# EAGLE board Launch-28020_V1 (EAGLE 8.4.0)
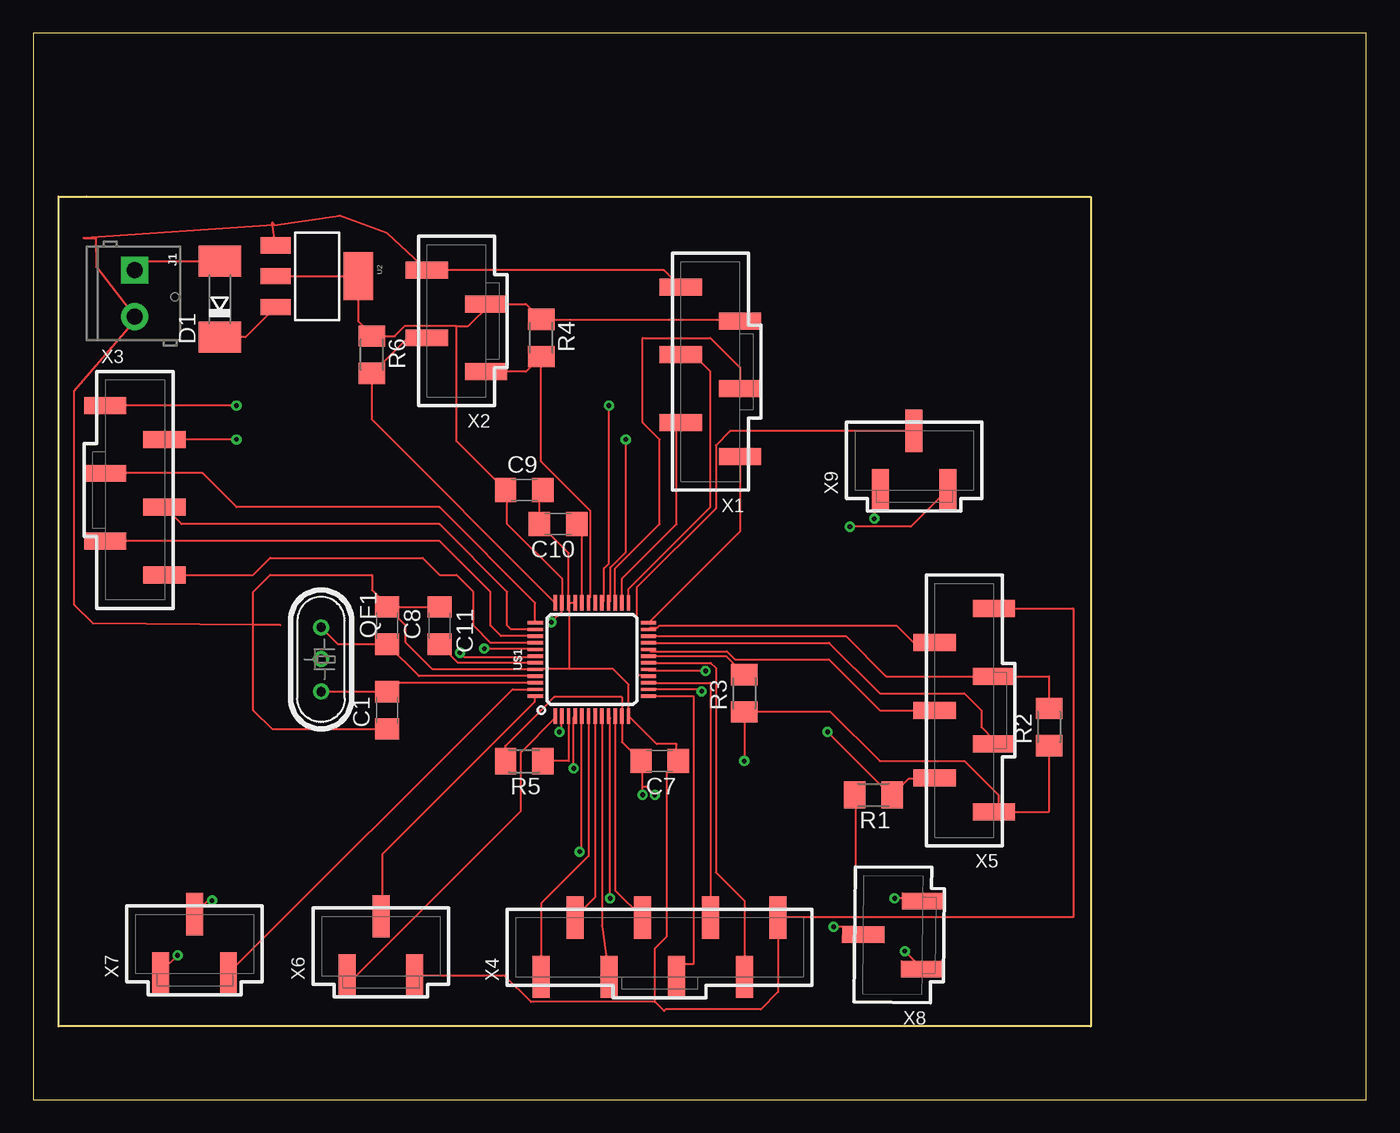
[diagram p0: board, top side]
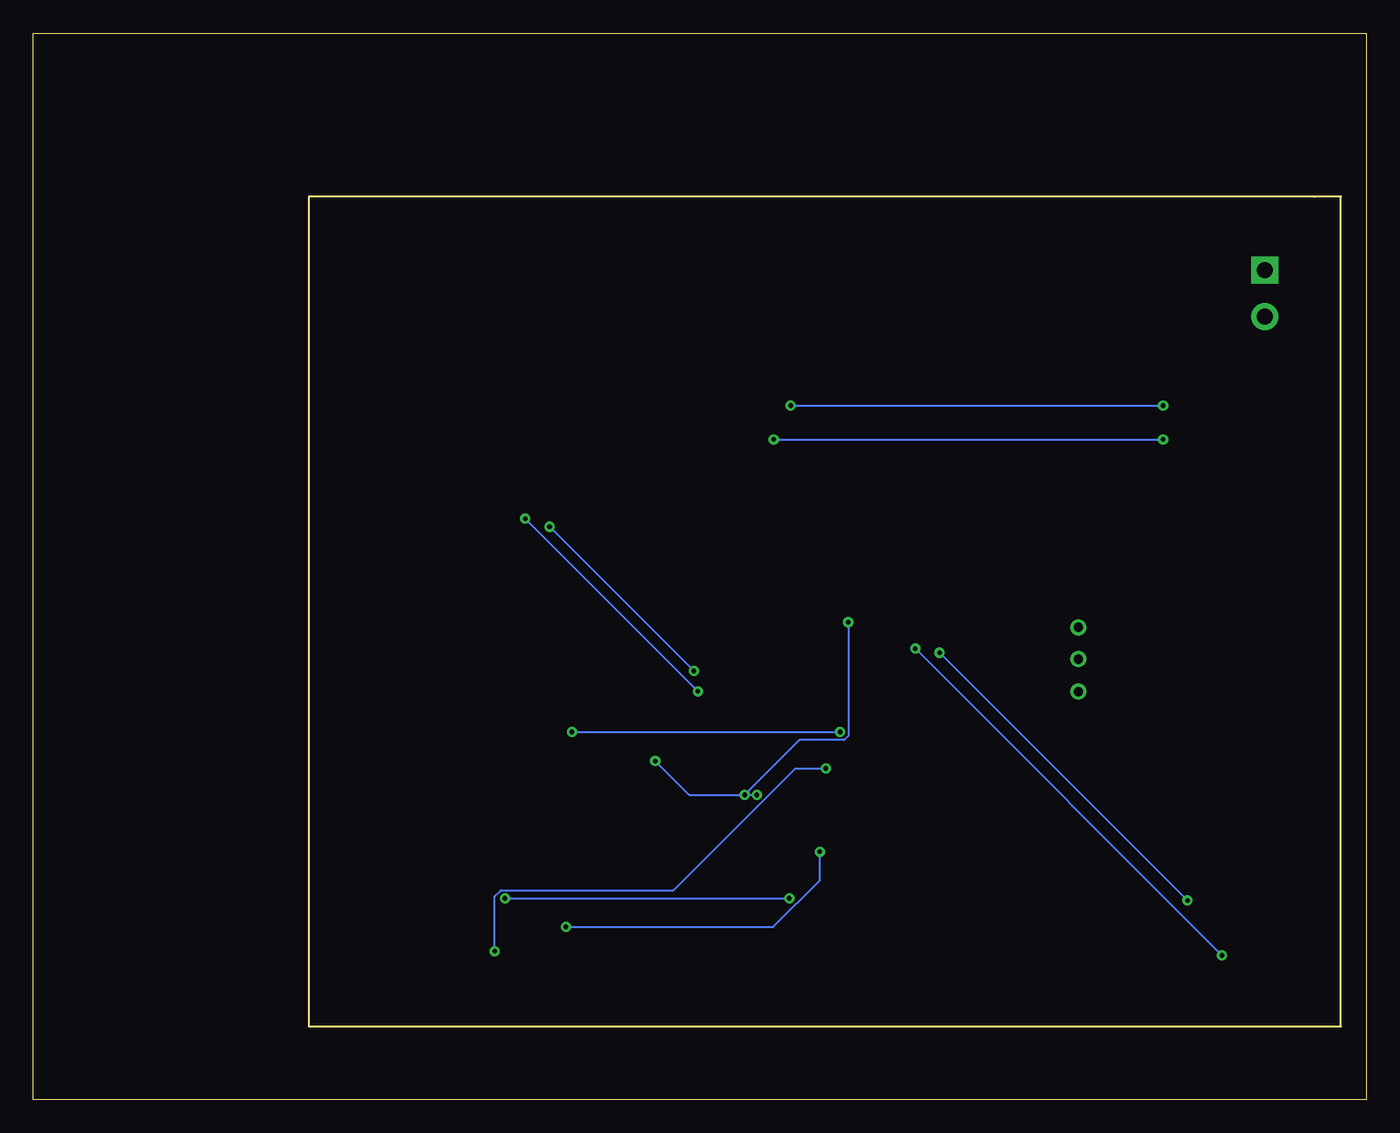
[diagram p1: board, bottom side, seen from below]

Size 100 x 80 mm. Coordinates in mm from the lower left corner, seen from the top.
Outline: 3.86,67.74 79.34,67.74 79.34,5.49 1.9,5.49 1.9,67.75 4,67.75
Outline: 0,0 100,0 100,80 0,80 0,0
Copper layers (1*16): Top 0.035mm / dielectric 1.5mm / Bottom 0.035mm
Design rules "default": minimum track width 6mil, minimum drill 0.35mm, track to track 6mil, track to pad 6mil, pad to pad 6mil, via to via 6mil, smd to smd 6mil, copper to edge 40mil, drill to drill 6mil, minimum pad ring 10mil, minimum via ring 8mil, stop-mask expansion 4mil, vias tented up to drill 0mil, thermal gap 10mil

## Footprints (pad centres in the part's own frame; a part is rotated, then mirrored left to right if it is on the bottom)
C1206 = smd 1.6 x 1.8: 1 -1.4,0; 2 1.4,0
SOD106-W = smd 2.3 x 3.2: A 2.85,0; C -2.85,0
SCREWTERMINAL-3.5MM-2-NS = drill 1.2 pad 2.032 square: 1 0,0 | drill 1.2 pad 2.032: 2 3.5,0
HC49U = drill 0.7 pad 1.2: 1 -2.413,0; 2 -0.027,0; 3 2.413,0
M1206 = smd 1.6 x 2: 1 -1.4,0; 2 1.4,0
SOT223 = smd 1.219 x 2.235: 1 -2.311,-3.099; 2 0,-3.099; 3 2.311,-3.099 | smd 3.6 x 2.2: 4 0,3.099
LQFP-48 = smd 0.254 x 1.143: 1 -2.75,-4.25; 2 -2.25,-4.25; 3 -1.75,-4.25; 4 -1.25,-4.25; 5 -0.75,-4.25; 6 -0.25,-4.25; 7 0.25,-4.25; 8 0.75,-4.25; 9 1.25,-4.25; 10 1.75,-4.25; 11 2.25,-4.25; 12 2.75,-4.25; 25 2.75,4.25; 26 2.25,4.25; 27 1.75,4.25; 28 1.25,4.25; 29 0.75,4.25; 30 0.25,4.25; 31 -0.25,4.25; 32 -0.75,4.25; 33 -1.25,4.25; 34 -1.75,4.25; 35 -2.25,4.25; 36 -2.75,4.25 | smd 1.143 x 0.254: 13 4.25,-2.75; 14 4.25,-2.25; 15 4.25,-1.75; 16 4.25,-1.25; 17 4.25,-0.75; 18 4.25,-0.25; 19 4.25,0.25; 20 4.25,0.75; 21 4.25,1.25; 22 4.25,1.75; 23 4.25,2.25; 24 4.25,2.75; 37 -4.25,2.75; 38 -4.25,2.25; 39 -4.25,1.75; 40 -4.25,1.25; 41 -4.25,0.75; 42 -4.25,0.25; 43 -4.25,-0.25; 44 -4.25,-0.75; 45 -4.25,-1.25; 46 -4.25,-1.75; 47 -4.25,-2.25; 48 -4.25,-2.75
74099-06 = smd 1.27 x 3.175: 1 -6.35,-2.223; 2 -3.81,2.223; 3 -1.27,-2.223; 4 1.27,2.223; 5 3.81,-2.223; 6 6.35,2.223
74099-04 = smd 1.27 x 3.175: 1 -3.81,-2.223; 2 -1.27,2.223; 3 1.27,-2.223; 4 3.81,2.223
74099-08 = smd 1.27 x 3.175: 1 -8.89,-2.223; 2 -6.35,2.223; 3 -3.81,-2.223; 4 -1.27,2.223; 5 1.27,-2.223; 6 3.81,2.223; 7 6.35,-2.223; 8 8.89,2.223
74099-07 = smd 1.27 x 3.175: 1 -7.62,-2.223; 2 -5.08,2.223; 3 -2.54,-2.223; 4 0,2.223; 5 2.54,-2.223; 6 5.08,2.223; 7 7.62,-2.223
74099-03 = smd 1.27 x 3.175: 1 -2.54,-2.223; 2 0,2.223; 3 2.54,-2.223

## Placement (x,y rotation side)
C1  [C1206]  26.54,29.21 90 top
C7  2.2uF  [C1206]  46.99,25.4 180 top
C8  [C1206]  26.54,35.56 270 top
C9  [C1206]  36.83,45.72 0 top
C10  2.2uF  [C1206]  39.37,43.18 180 top
C11  2.2uf  [C1206]  30.48,35.56 270 top
D1  [SOD106-W]  13.99,60.05 90 top
J1  [SCREWTERMINAL-3.5MM-2-NS]  7.62,62.23 270 top
QF1  8M10AHC49T  [HC49U]  21.59,33.02 270 top
R1  2k2  [M1206]  63.03,22.86 180 top
R2  56k  [M1206]  76.2,27.94 90 top
R3  56k  [M1206]  53.34,30.48 90 top
R4  2k2  [M1206]  38.1,57.15 270 top
R5  2k2  [M1206]  36.83,25.4 180 top
R6  2k2  [M1206]  25.4,55.88 270 top
U2  [SOT223]  21.29,61.77 270 top
U$1  TMS320F28020  [LQFP-48]  41.91,33.02 0 top
X1  C-GRID-06-74099  [74099-06]  50.8,54.61 90 top
X2  C-GRID-04-74099  [74099-04]  31.75,58.42 90 top
X3  C-GRID-06-74099  [74099-06]  7.62,45.72 270 top
X4  C-GRID-08-74099  [74099-08]  46.99,11.43 0 top
X5  C-GRID-07-74099  [74099-07]  69.85,29.21 90 top
X6  C-GRID-03-74099  [74099-03]  26.08,11.52 0 top
X7  C-GRID-03-74099  [74099-03]  12.1,11.68 0 top
X8  C-GRID-03-74099  [74099-03]  64.5,12.36 89.4 top
X9  C-GRID-03-74099  [74099-03]  66.08,47.96 0 top

## Library data of the parts
C1 C7-C11 = rcl
D1 = diode
J1 = SparkFun-Connectors; PROD_ID: CONN-08399
QF1 = crystal; OC_FARNELL: unknown; OC_NEWARK: unknown
R1-R6 = resistor
U2 = SparkFun-IC-Power; PROD_ID: VREG-08170
U$1 = TMS320F28020
X1-X9 = con-molex; OC_FARNELL: unknown; OC_NEWARK: unknown

## Nets
ADC_A0: U$1.10 X4.4
ADC_A1: U$1.8 X4.3
ADC_A3: U$1.7 X4.2
ADC_A7: U$1.6 X4.1
ADC_B1: U$1.13 X4.5
ADC_B3: U$1.15 X4.6
ADC_B7: U$1.18 X4.7
AIO2: U$1.9 X8.3
AIO4: U$1.5 X8.2
AIO6: U$1.4 X8.1
AIO10: U$1.14 X9.1
AIO12: U$1.16 X9.2
AIO14: U$1.17 X9.3
GND: C1.1 C7.1 C8.1 C9.2 C10.2 C11.1 J1.2 R1.2 U2.1 U$1.12 U$1.33 U$1.34 U$1.44 X1.6 X2.4 X4.8 X5.7 X6.3
GPIO6: U$1.41 X7.1
GPIO7: U$1.42 X7.2
GPIO12: U$1.47 X7.3
I2C_SCL: R6.2 U$1.36 X2.2
I2C_SDA: R4.2 U$1.31 X2.1
N$1: D1.A J1.1
N$3: C10.1 U$1.32
N$4: C11.2 U$1.43
N$5: R5.1 U$1.3
N$6: C8.2 QF1.1 U$1.45
N$7: C1.2 QF1.3 U$1.46
N$8: D1.C U2.3
N$12: R3.2 U$1.19
PWM1H: U$1.29 X3.1
PWM1L: U$1.28 X3.2
PWM2H: U$1.37 X3.3
PWM2L: U$1.38 X3.4
PWM3H: U$1.39 X3.5
PWM3L: U$1.40 X3.6
SPI_CS: U$1.25 X1.4
SPI_MISO: U$1.26 X1.2
SPI_MOSI: U$1.27 X1.3
SPI_SCK: U$1.24 X1.1
TCK: U$1.23 X5.6
TDI: U$1.20 X5.4
TDO: R2.2 U$1.22 X5.5
TMS: U$1.21 X5.3
TRST: R1.1 U$1.2 X5.2
UART_RX: U$1.48 X6.2
UART_TX: U$1.1 X6.1
VDD: C7.2 C9.1 R2.1 R3.1 R4.1 R5.2 R6.1 U2.2 U2.4 U$1.11 U$1.35 X1.5 X2.3 X5.1

## Tracks (layer width: path | path; a pad name or v marks a point on that pad's centre or on a via)
ADC_A0
  Top 0.152: U$1.10 43.66,15.71 X4.4
ADC_A1
  Top 0.152: X4.3 42.67,13.03 42.66,28.25 U$1.8
ADC_A3
  Top 0.152: U$1.7 42.16,15.17 X4.2
ADC_A7
  Top 0.152: U$1.6 41.66,18.27 38.1,14.71 X4.1
ADC_B1
  Top 0.152: U$1.13 49.53,30.27 49.53,10.16 48.26,10.16 X4.5
ADC_B3
  Top 0.152: U$1.15 50.8,31.27 X4.6
ADC_B7
  Top 0.152: U$1.18 50.82,32.77 51.21,32.38 51.21,17.04 53.34,14.91 X4.7
AIO2  (via drill 0.35)
  Top 0.152: v43.28,15.09 43.28,28.65 U$1.9 | v64.62,15.09 66.45,15.09 66.6,14.94 X8.3
  Bottom 0.152: v64.62,15.09 v43.28,15.09
AIO4  (via drill 0.35)
  Top 0.152: v41,18.59 41.15,18.75 41.15,28.65 U$1.5 | v60.05,12.95 61.72,12.95 62.18,12.5 X8.2
  Bottom 0.152: v41,18.59 41,16.46 44.5,12.95 v60.05,12.95
AIO6  (via drill 0.35)
  Top 0.152: v40.54,24.84 40.54,28.65 U$1.4 | v65.38,11.12 66.6,9.91 X8.1
  Bottom 0.152: v40.54,24.84 42.82,24.84 51.97,15.7 64.92,15.7 65.38,15.24 v65.38,11.12
AIO10  (via drill 0.35)
  Top 0.152: v50.14,30.63 49.99,30.79 46.18,30.79 U$1.14 | v63.09,43.59 63.09,45.41 63.4,45.72 X9.1
  Bottom 0.152: v63.09,43.59 v50.14,30.63
AIO12
  Top 0.152: U$1.16 46.02,31.85 45.41,31.85 45.26,32 45.26,38.41 51.21,44.35 51.21,49.07 52.27,50.14 65.99,50.14 X9.2
AIO14  (via drill 0.35)
  Top 0.152: v50.44,32.16 46.18,32.16 U$1.17 | v61.27,42.98 65.84,42.98 68.58,45.72 X9.3
  Bottom 0.152: v61.27,42.98 v50.44,32.16
GND
  Top 0.152: 26.67,36.96 C8.1 27.94,35.56 27.94,34.29 29.96,32.27 U$1.44 37.68,32.29 40.23,32.29 | 26.67,36.96 C11.1 | C1.1 17.91,27.81 16.51,29.21 16.51,35.66 | 16.51,35.66 16.51,38.1 17.78,39.37 25.4,39.37 25.4,38.23 26.67,36.96 | U$1.33 U$1.34 | 44.66,29.31 U$1.12 | U$1.12 46.76,26.67 48.26,26.67 48.26,25.4 C7.1 47.54,24.55 47.54,12.25 46.65,11.36 46.65,7.32 | U$1.34 40.16,40.99 C10.2 37.97,45.46 C9.2 | X1.6 47.31,62.23 X2.4 26.55,64.99 22.97,66.32 18.08,65.61 | 18.54,35.59 16.46,35.61 | 16.46,35.61 4.48,35.71 3.07,37.12 3.07,53.17 7.62,58.42 J1.2 4.72,62.49 4.69,64.6 3.78,64.65 18.08,65.61 | U2.1 17.93,65.8 18.08,65.61 | X5.7 78.02,36.86 78.02,13.68 61.72,13.66 | 61.72,13.66 X4.8 55.88,8.06 54.58,6.76 47.43,6.76 47.32,6.66 46.65,7.32 | U$1.12 44.66,31.13 43.5,32.29 40.23,32.29 | R1.2 61.72,22.86 61.72,13.72 61.72,13.66 | X6.3 35.36,9.3 37.34,7.32 46.63,7.32 46.65,7.32 | 40.23,32.29 40.23,37.19 U$1.34 | 16.51,35.66 16.46,35.66 16.46,35.61
GPIO6  (via drill 0.35)
  Top 0.152: v33.83,33.83 37.64,33.83 U$1.41 | v10.82,10.82 9.6,9.6 X7.1
  Bottom 0.152: v10.82,10.82 v33.83,33.83
GPIO7  (via drill 0.35)
  Top 0.152: v32,33.53 32.31,33.22 37.64,33.22 U$1.42 | v13.41,14.94 13.11,14.94 12.19,14.02 X7.2
  Bottom 0.152: v13.41,14.94 v32,33.53
GPIO12
  Top 0.152: X7.3 35.97,30.79 37.64,30.79 U$1.47
I2C_SCL
  Top 0.152: X2.2 28.07,57.15 R6.2 25.4,51.03 U$1.36
I2C_SDA
  Top 0.152: X2.1 36.96,54.61 R4.2 38.1,47.87 41.8,44.17 41.8,37.7 41.66,37.56 U$1.31
N$1
  Top 0.152: J1.1 8.29,62.9 D1.A
N$2  (via drill 0.35)
  other vias: 45.72,22.86
N$3
  Top 0.152: U$1.32 41.16,42.79 C10.1
N$4
  Top 0.152: U$1.43 31.87,32.77 C11.2
N$5
  Top 0.152: U$1.3 40.16,25.4 R5.1
N$6
  Top 0.152: U$1.45 28.93,31.77 C8.2 22.86,34.16 QF1.1
N$7
  Top 0.152: U$1.46 27.2,31.27 C1.2 QF1.3
N$8
  Top 0.152: U2.3 15.93,57.2 D1.C 13.55,57.2 13.45,57.3
N$12
  Top 0.152: U$1.19 51.95,33.27 R3.2
PWM1H  (via drill 0.35)
  Top 0.152: U$1.29 42.8,37.41 42.8,39.86 43.18,40.23 v43.18,52.07 | v15.24,52.07 X3.1
  Bottom 0.152: v43.18,52.07 v15.24,52.07
PWM1L  (via drill 0.35)
  Top 0.152: U$1.28 43.3,37.41 43.3,39.92 44.45,41.07 v44.45,49.53 | v15.24,49.53 X3.2
  Bottom 0.152: v44.45,49.53 v15.24,49.53
PWM2H
  Top 0.152: U$1.37 37.66,37.27 30.48,44.45 15.24,44.45 12.7,46.99 X3.3
PWM2L
  Top 0.152: U$1.38 35.85,35.27 35.56,35.56 35.56,38.1 30.48,43.18 11.11,43.18 X3.4
PWM3H
  Top 0.152: U$1.39 35.08,34.77 34.29,35.56 34.29,38.1 30.48,41.91 X3.5
PWM3L
  Top 0.152: U$1.40 34.31,34.27 33.02,35.56 33.02,38.1 31.75,39.37 30.48,39.37 29.21,40.64 17.78,40.64 16.51,39.37 X3.6
SPI_CS
  Top 0.152: U$1.25 44.66,38.31 50.8,44.45 50.8,54.61 49.53,55.88 X1.4
SPI_MISO
  Top 0.152: U$1.26 44.16,39.08 48.26,43.18 48.26,50.48 X1.2
SPI_MOSI
  Top 0.152: U$1.27 43.66,39.85 46.99,43.18 46.99,49.53 45.72,50.8 45.72,57.15 50.8,57.15 53.02,54.93 X1.3
SPI_SCK
  Top 0.152: X1.1 53.02,42.63 U$1.24
TCK
  Top 0.152: U$1.23 46.3,35.41 46.83,35.41 46.97,35.56 64.77,35.56 66.04,34.29 X5.6
TDI
  Top 0.152: U$1.20 46.3,33.63 52.02,33.63 52.63,33.02 59.69,33.02 63.5,29.21 X5.4
TDO
  Top 0.152: U$1.22 60.96,34.77 63.98,31.75 X5.5 76.2,31.75 R2.2
TMS
  Top 0.152: U$1.21 59.71,34.27 63.5,30.48 69.85,30.48 71.12,29.21 71.12,27.94 72.07,26.99 X5.3
TRST  (via drill 0.35)
  Top 0.152: v39.47,27.58 39.62,27.74 39.62,28.65 U$1.2 | v59.59,27.58 64.31,22.86 R1.1 64.47,22.86 65.68,24.08 67.51,24.08 X5.2
  Bottom 0.152: v59.59,27.58 v39.47,27.58
UART_RX
  Top 0.152: U$1.48 37.64,30.18 37.64,29.87 26.21,18.44 26.21,13.87 X6.2
UART_TX
  Top 0.152: X6.1 24.23,9.3 36.58,21.64 36.58,26.06 39.17,28.65 U$1.1
VDD  (via drill 0.35)
  Top 0.152: 38.1,29.21 39.08,30.19 44.16,30.19 U$1.11 44.16,26.83 C7.2 45.68,25.4 45.68,23.47 | 38.1,29.21 37.97,29.21 | R2.1 76.2,21.59 72.39,21.59 | 72.39,21.59 X5.1 | 72.39,21.59 72.39,22.86 69.85,25.4 63.5,25.4 59.82,29.08 R3.1 v53.34,25.4 | 34.29,59.69 X2.3 | 34.29,59.69 36.96,59.69 R4.1 38.1,58.52 52.88,58.52 X1.5 | 25.5,57.28 R6.1 | 25.5,57.28 27.11,57.28 27.84,58.01 31.75,58.01 | 34.29,59.69 32.61,58.01 31.75,58.01 | 31.75,58.01 31.75,49.4 C9.1 35.56,45.59 35.56,43.18 39.66,39.08 U$1.35 39.62,37.19 39.62,36.58 v38.86,35.81 | R5.2 35.43,26.54 38.1,29.21 | U2.2 U2.4 24.38,58.39 25.5,57.28 | 45.68,23.47 45.68,22.76 | 45.68,23.47 46.02,23.47 v46.63,22.86
  Bottom 0.152: v53.34,25.4 50.8,22.86 v46.63,22.86 46.33,22.86 | 45.71,22.85 45.71,22.86 46.33,22.86 | 46.33,22.86 46.33,23.16 42.52,26.98 39.17,26.98 38.86,27.28 v38.86,35.81